# Altium PCB Wheel_Encoder_PCB.PcbDoc
Units mil, origin at the board's own origin, x right, y up, seen from the top; angles counter-clockwise.
Board outline 1590 x 1235 mil, 2 copper layers (Top Layer, Bottom Layer); 7 components, 6 nets, 25 pads, 0 vias.
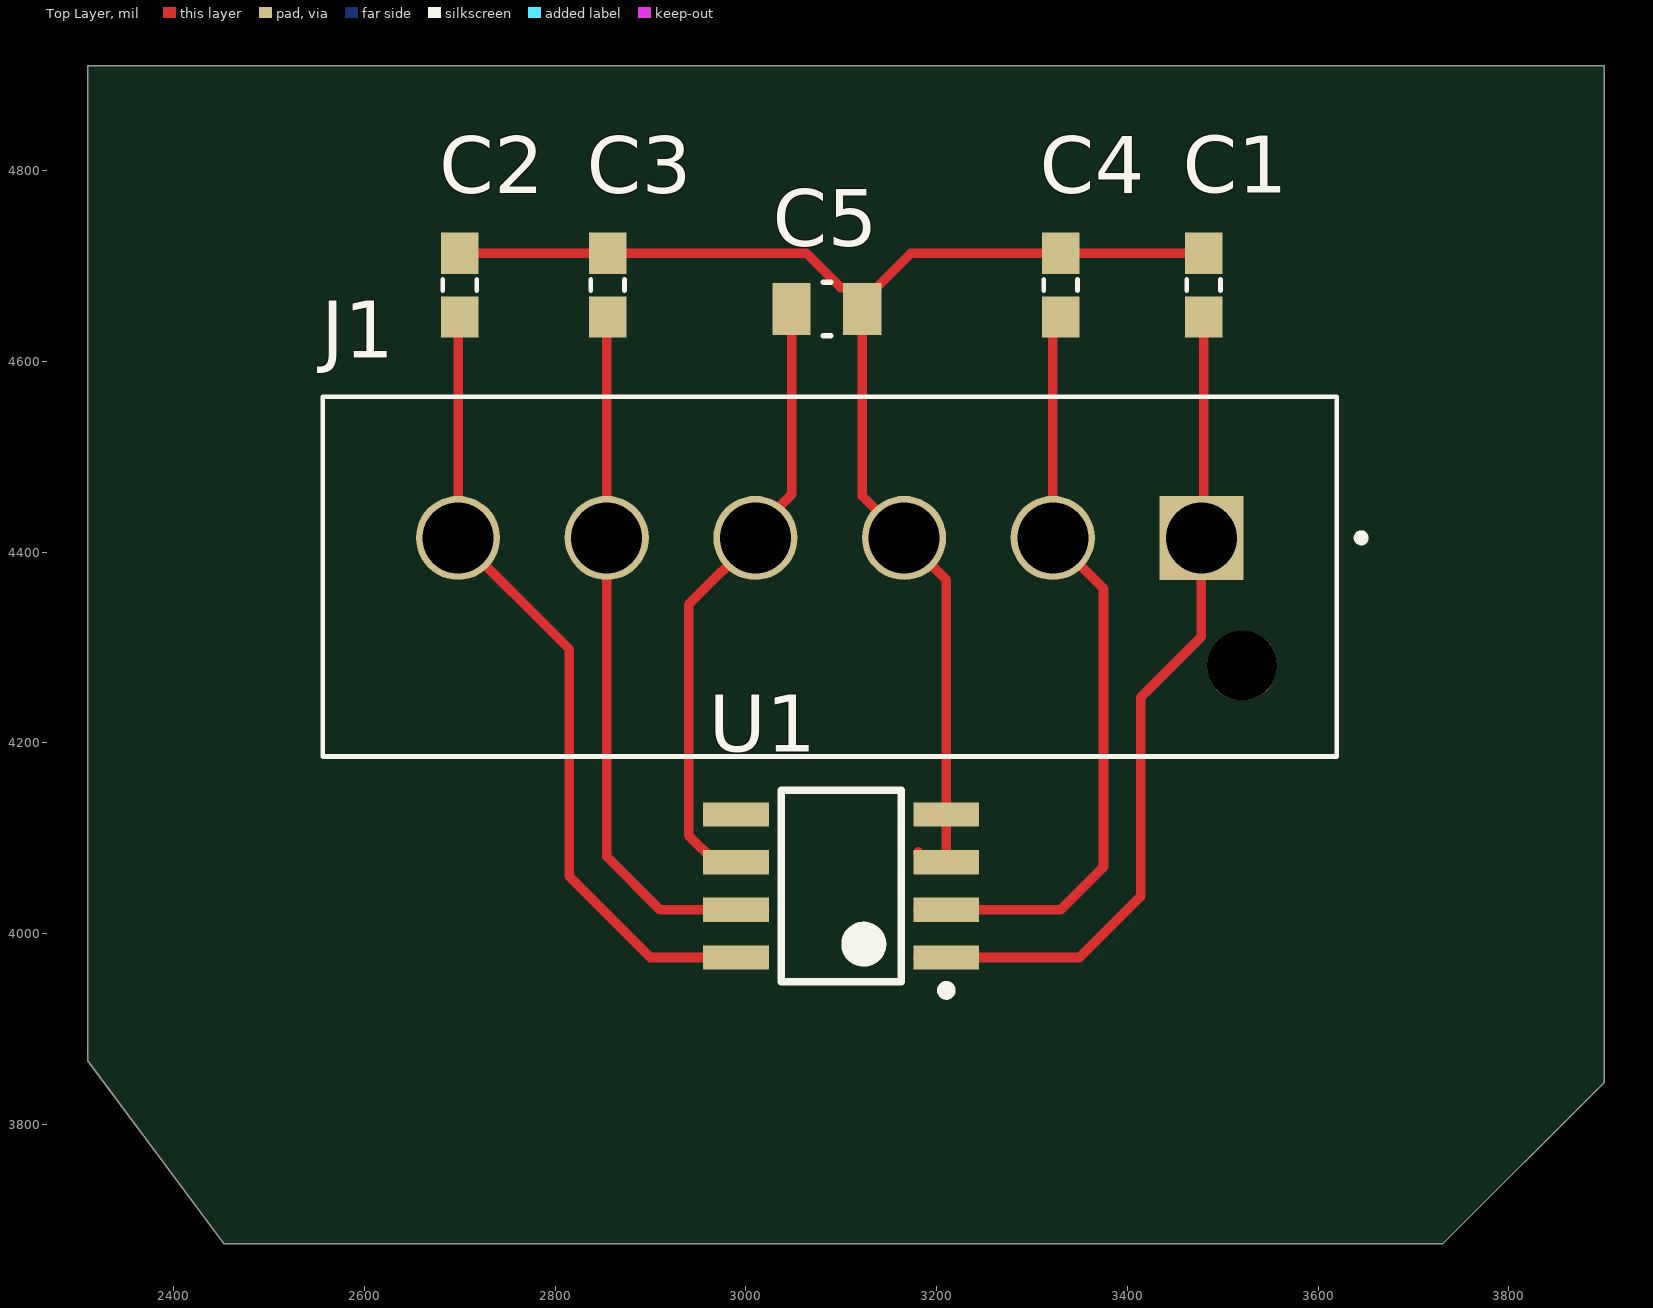
[diagram p0: Top Layer view]
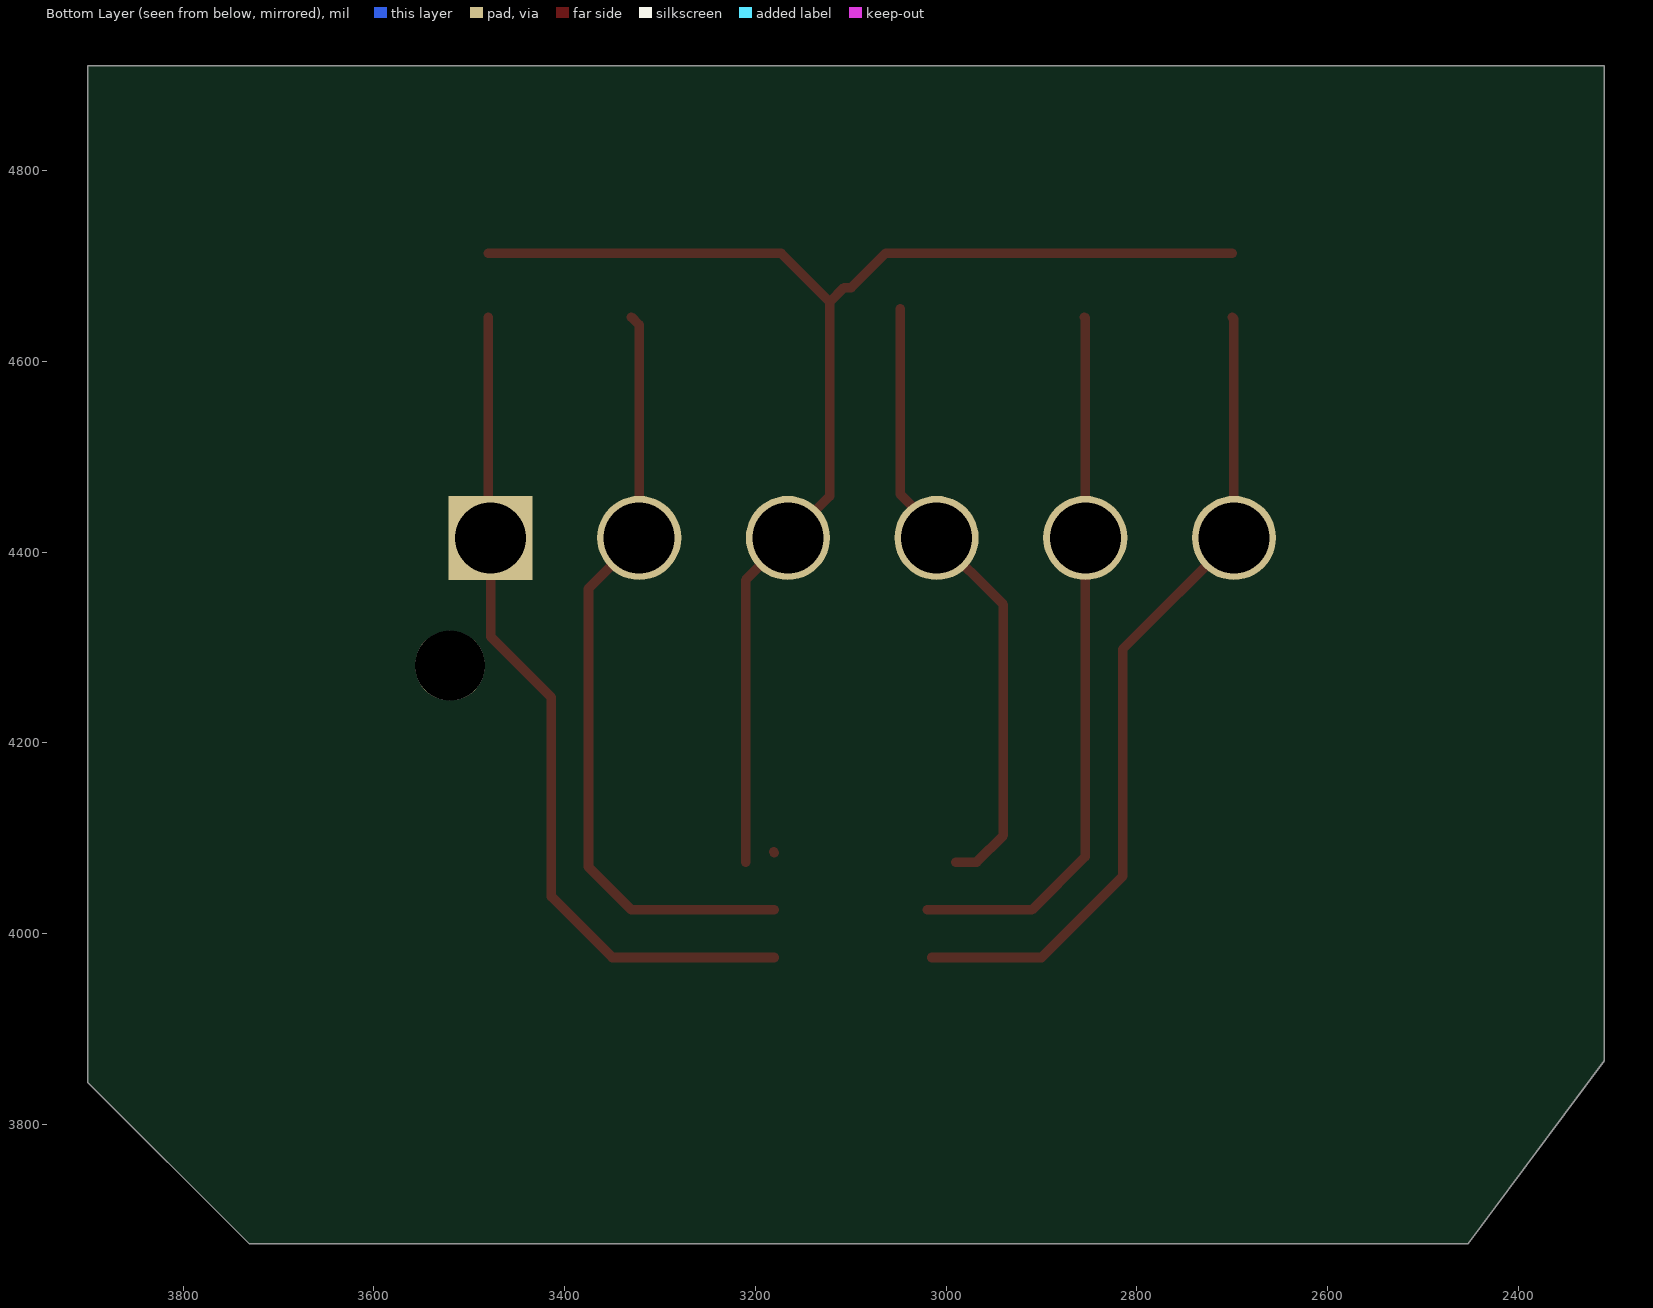
[diagram p1: Bottom Layer view, seen from below]

## Layer stack, top to bottom
Top Solder: solder mask 0.4, Solder Resist, Dk 3.5
Top Layer: signal copper 1.4
Dielectric 1: dielectric 12.6, FR-4, Dk 4.8
Bottom Layer: signal copper 1.4
Bottom Solder: solder mask 0.4, Solder Resist, Dk 3.5

## Board outline
2452.57,3675 3730.91,3675 3900,3844.09 3900,4910 2310,4910 2310,3866.76

## Design rules (kind name [scope] priority, off if disabled: settings)
Clearance [All] p1: gap=10 ignorepadtopadclearanceinfootprint=FALSE except(0: Arc-Hole Track-Hole SMDPad-Hole THPad-Hole Via-Hole Fill-Hole Poly-Hole Region-Hole Text-Hole)
PolygonConnect [All] p1: connectstyle=Relief reliefconductorwidth=10 reliefentries=4 polygonreliefangle="90 Angle" airgapwidth=10
RoomDefinition Wheel_Encoder_Board_Schematic1 [InComponentClass('Wheel_Encoder_Board_Schematic1')] p1: confinementstyle=ConfineIn formatcopy=TRUE lockcomponents=FALSE outline 7045,1060 8725,1060 8725,2285 7045,2285
RoutingVias [All] p1: holewidth=28 width=50 viastyle="Through Hole" minholewidth=28 minwidth=50 maxholewidth=28 maxwidth=50
SolderMaskExpansion [All] p1: expansion=4 istentingtop=FALSE
Width [All] p1: maxlimit=10 minlimit=10 preferedwidth=10
30 further rules are at their usual default settings.

## Components (designator, comment, footprint, x,y, rotation, side; value= is the part's Value field where it differs from the comment)
C1 "0.068uF" 0603 3480,4680 r90 top
C2 "0.068uF" 0603 2700,4680 r90 top
C3 "0.068uF" 0603 2855,4680 r270 top
C4 "0.068uF" 0603 3330,4680 r270 top
C5 "0.1uF 25V" 0805 3085,4655 r180 top value=0.1uF
J1 "CONN HEADER VERT 6POS 3.96MM" "CN HDR 6POS 3.96MM" 3477.72,4415 r180 top
U1 "TLE5501" 8-SOIC 3100,4050 r180 top

## Footprints (in the part's own frame and the unit in brackets; to place one, negate y for a bottom-side part, rotate by r counter-clockwise, add the part's x,y. Pads: shape width x height; smd on the part's side, far side on the other; paste and mask are expansions set on the pad)
8-SOIC [mm]
  rect 1.75x0.65 smd: 1(-2.8,1.905) 2(-2.8,0.635) 3(-2.8,-0.635) 4(-2.8,-1.905) 5(2.8,-1.905) 6(2.8,-0.635) 7(2.8,0.635) 8(2.8,1.905)
  silkscreen extent -2.93,-2.55 1.6,2.9, body extent -2,-2.55 2,2.55, height 1.7
0603 [mm]
  rect 1.1x1 smd: 1(-0.85,0) 2(0.85,0)
  silkscreen extent -0.15,-0.45 0.15,0.45
0805 [mil]
  rect 40x55 smd: 1(-37,0) 2(37,0)
  silkscreen extent -4,-28 4,28
"CN HDR 6POS 3.96MM" [mm]
  rect 2.24x2.24 hole 1.89: 1(0,0)
  round 2.24 hole 1.89: 2(3.96,0) 3(7.92,0) 4(11.88,0) 5(15.84,0) 6(19.8,0)
  round 1.86 hole 1.86 unplated: None(-1.08,3.4)
  silkscreen extent -4.36,-3.76 23.41,5.82

## Part data
C1 C2 C3 C4: library part "CAP 0.068uF 16V", "CAP CER 0.068UF 16V X5R 0603/0805", Operating Temperature="-55°C ~ 85°C", Package=0603/0805, Rating=16V, Temperature Coefficient=X5R, Tolerance=10%
C5: library part "CAP 0.1uF 25V", "CAP CER 0.1UF 25V X7R 0805", Operating Temperature="-55°C ~ 125°C", Rating=25V, Temperature Coefficient=X7R, Tolerance=10%
J1: library part "CN HDR 6POS 3.96MM", Current Rating=7.5A, Supplier Part Number 1=A99849-ND, Voltage Rating=250VAC, Digikey=A99849-ND, Digikey Link=https://www.digikey.ca/product-detail/en/te-connectivity-amp-connectors/1877285-6/A99849-ND/2000097, MF="TE Connectivity", MP=1877285-6, SnapEDA_Link=https://www.snapeda.com/parts/1877285-6/TE%20Connectivity/view-part/2371244/?ref=snap, Supplier 1=Digi-Key
U1: "TMR 360deg Magnetic Encoder", Digi-Key Part Number=TLE5501E0001XUMA1DKR-ND, Manufacturer="Infineon Technologies", Manufacturer Part Number=TLE5501E0001XUMA1, Package=PG-DSO-8-16, Supplier Part Number 1=TLE5501E0001XUMA1CT-ND, Supplier 1=Digi-Key

## Nets (pads, with @x,y where several pads share a name; then routed paths per layer and width w, separated by ;. In a path a pad name is that pad's centre, name@x,y a point inside that pad or via, vN(x,y) a via of type N, cw(c..) or ccw(c..) an arc to the next point about the centre after c; other vN are vias at no path point)
D1: C1.1 J1.1 U1.1 | length 895.4
  Top Layer w10: U1.1@3180,3975 U1.1 3350,3975 3413.86,4038.86 3413.86,4247.76 3477.72,4311.62 J1.1 3480,4417.28 C1.1
D2: C4.2 J1.2 U1.2 | length 815.6
  Top Layer w10: U1.2@3180,4025 U1.2 3330,4025 3375,4070 3375,4361.81 J1.2 3321.81,4638.35 C4.2
D3: C1.2 C2.2 C3.1 C4.1 C5.1 J1.3 U1.3 U1.4 | length 1447.2
  Top Layer w10: C2.2 C3.1 3063.54,4713.46 3099.5,4677.5 3107,4677.5 C5.1@3122,4662.5 ; U1.3@3180.24,4085 U1.3@3180.91,4085.67 ; U1.3 U1.4 3210.24,4370.67 J1.3 3122,4458.91 C5.1 C5.1@3122,4662.5 ; C1.2 C4.1 3172.96,4713.46 C5.1@3122,4662.5
D4: C5.2 J1.4 U1.6 | length 658
  Top Layer w10: U1.6 2968.11,4075 2940,4103.11 2940,4345 J1.4 3010,4422.57 3048,4460.57 C5.2
D5: C3.2 J1.5 U1.7 | length 755.1
  Top Layer w10: C3.2 2854.09,4645.63 J1.5 2854.09,4080.91 2910,4025 U1.7 U1.7@3020,4025
D6: C2.1 J1.6 U1.8 | length 870.9
  Top Layer w10: C2.1 2698.19,4644.72 J1.6 2815,4298.19 2815,4060 2900,3975 U1.8 U1.8@3015,3975
pads on no net: J1.None U1.5